# Altium PCB Altium-USBMETER-V1.5-Design-unverified.pcbdoc (part 2 of 2)
Units mm, origin at the board's own origin, x right, y up, seen from the top; angles counter-clockwise.
Board outline 73.46 x 110.88 mm, 4 copper layers (Top Layer, Inner1, Inner2, Bottom Layer); 47 components, 49 nets, 284 pads, 317 vias.
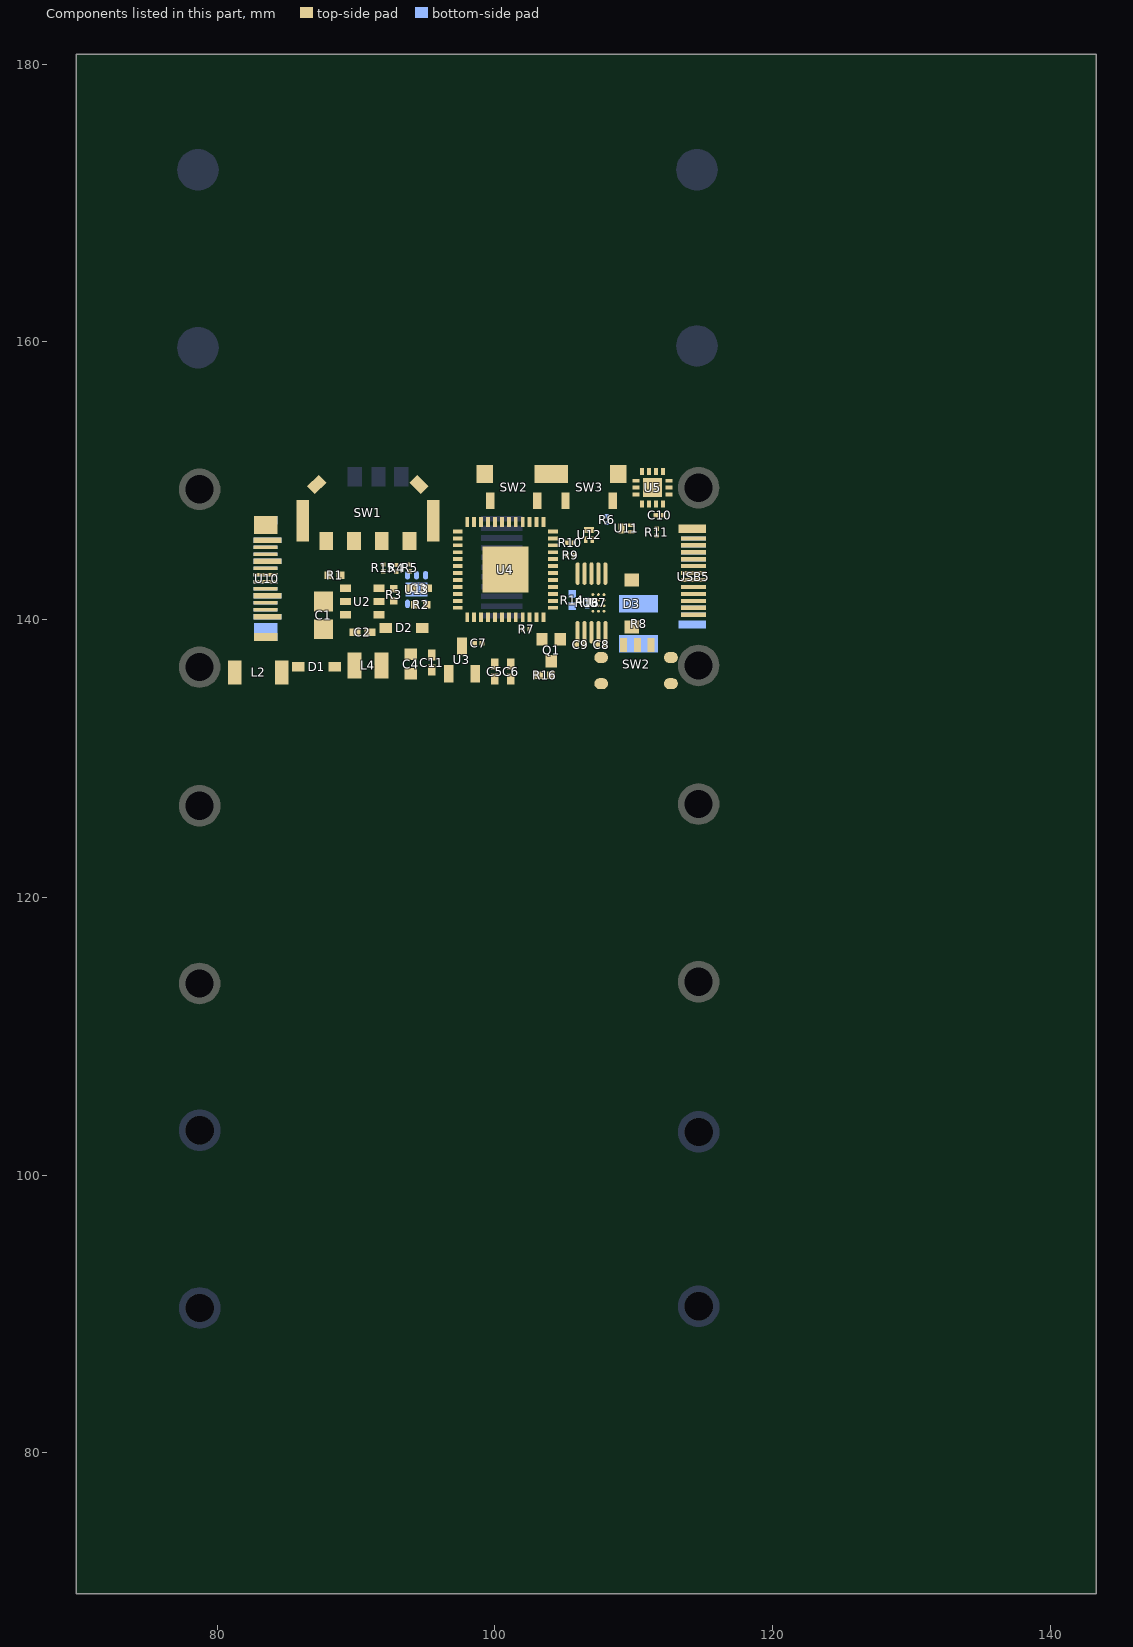
[diagram p4: the components of this part, seen from the top]

## Other copper (continued)
Inner1:
  region net TX: 90.293,149.659 90.293,149.959 90.433,149.909 90.433,149.709
  region net RX: 92.01,149.676 91.71,149.677 91.76,149.536 91.96,149.536
  region net 3V3: 93.134,149.908 93.037,149.624 93.182,149.616 93.254,149.827
  region net 3V3: 96.708,146.443 96.496,146.231 96.432,146.366 96.574,146.507
  region net RX: 96.273,144.708 96.061,144.496 95.997,144.631 96.138,144.772
  region net TX: 95.775,144.273 95.483,144.202 95.482,144.346 95.709,144.401
  region net SW4: 110.673,146.309 110.461,146.521 110.397,146.387 110.538,146.246
  region net SW4: 104.885,142.371 104.673,142.583 104.807,142.647 104.949,142.506
  region net 3V3: 105.343,143.383 105.342,143.083 105.482,143.133 105.483,143.333
  region net IO0: 93.06,144.021 92.848,143.809 92.982,143.745 93.124,143.887
  region net IO0: 98.428,143.459 98.428,143.759 98.288,143.709 98.288,143.509
  region net LNA: 98.66,139.301 98.36,139.301 98.41,139.161 98.61,139.161
  region net LNA: 81.66,135.621 81.448,135.409 81.582,135.345 81.723,135.487
  region net LED-: 102.71,145.476 102.41,145.476 102.46,145.336 102.66,145.336
  region net BL: 104.41,138.741 104.11,138.741 104.16,138.881 104.36,138.881
  region net SDA: 98.128,144.859 98.128,144.559 97.988,144.609 97.988,144.809
  region net SCL: 98.36,145.321 98.148,145.533 98.282,145.597 98.424,145.456
  region net SDA: 106.125,145.298 105.864,145.149 105.835,145.293 106.015,145.396
  region net SCL: 105.807,144.395 105.541,144.257 105.509,144.398 105.709,144.502
  region net DM: 104.91,141.676 104.61,141.676 104.66,141.536 104.86,141.536
  region net DM: 105.41,136.241 105.11,136.241 105.16,136.381 105.36,136.381
  region net DP: 104.91,135.916 104.61,135.916 104.66,136.056 104.86,136.056
  region net CC2: 101.51,150.841 101.21,150.841 101.26,150.98 101.46,150.98
  region net DP: 103.76,141.122 103.548,140.91 103.682,140.847 103.823,140.988
  region net BL: 103.373,143.909 103.161,144.121 103.097,143.987 103.238,143.845
  region net LED-: 102.71,138.541 102.41,138.541 102.46,138.681 102.66,138.681
  region net 3V3: 111.479,147.358 111.478,147.658 111.338,147.608 111.339,147.408
  region net CC2G: 99.793,148.559 99.792,148.859 99.932,148.804 99.933,148.614
  region net CC2: 112.378,143.523 112.078,143.535 112.134,143.673 112.334,143.664
  region net CC1: 111.531,142.667 111.531,142.967 111.391,142.917 111.391,142.717
  region net CC1: 108.736,149.09 108.436,149.092 108.487,149.231 108.687,149.23
  region net CC2G: 106.923,147.358 106.71,147.146 106.65,147.284 106.785,147.418
  region net CC2G: 107.042,147.009 107.042,147.309 107.182,147.254 107.182,147.064
  region net CC2G: 112.028,147.959 112.028,148.259 111.888,148.204 111.888,148.014
  region net CC1G: 110.05,148.436 110.05,148.736 109.91,148.681 109.91,148.491
  region net CC1G: 109.26,147.791 108.96,147.791 109.015,147.931 109.205,147.931
  region net CC1: 86.574,142.501 86.572,142.801 86.705,142.752 86.706,142.552
  region net CC2: 85.883,143.52 85.671,143.307 85.612,143.437 85.753,143.578
  region net TX: 90.433,149.709 90.433,149.909 90.416,149.91 90.398,149.913 90.378,149.917 90.359,149.923 90.34,149.931 90.322,149.939 90.306,149.949 90.293,149.959 90.293,149.659 90.306,149.669 90.322,149.678 90.34,149.687 90.359,149.694 90.378,149.7 90.398,149.705 90.416,149.708
  region net RX: 91.76,149.536 91.96,149.536 91.961,149.553 91.964,149.571 91.969,149.591 91.975,149.61 91.982,149.629 91.991,149.647 92,149.663 92.01,149.676 91.71,149.676 91.72,149.663 91.73,149.647 91.738,149.629 91.746,149.61 91.752,149.591 91.756,149.572 91.759,149.553
  region net 3V3: 93.167,149.631 93.309,149.772 93.291,149.783 93.269,149.788 93.245,149.79 93.198,149.792 93.179,149.796 93.166,149.805 93.16,149.821 92.948,149.609 92.96,149.609 92.974,149.611 92.988,149.614 93.033,149.626 93.08,149.64 93.095,149.643 93.109,149.645 93.123,149.646 93.136,149.645 93.147,149.643 93.158,149.638
  region net 3V3: 96.574,146.507 96.432,146.366 96.443,146.353 96.454,146.338 96.465,146.321 96.474,146.303 96.482,146.284 96.489,146.266 96.494,146.248 96.496,146.231 96.708,146.443 96.692,146.446 96.674,146.45 96.655,146.457 96.636,146.465 96.618,146.475 96.601,146.485 96.586,146.496
  region net RX: 96.138,144.772 95.997,144.631 96.008,144.618 96.019,144.603 96.029,144.586 96.039,144.568 96.047,144.549 96.054,144.531 96.058,144.513 96.061,144.496 96.273,144.708 96.256,144.711 96.238,144.715 96.22,144.722 96.201,144.73 96.183,144.74 96.166,144.75 96.151,144.761
  region net TX: 95.638,144.472 95.497,144.331 95.51,144.309 95.512,144.283 95.507,144.253 95.496,144.221 95.472,144.156 95.463,144.125 95.461,144.096 95.673,144.308 95.656,144.315 95.648,144.329 95.647,144.35 95.652,144.402 95.653,144.429 95.65,144.453
  region net SW4: 110.397,146.387 110.538,146.246 110.551,146.257 110.566,146.268 110.583,146.278 110.601,146.287 110.62,146.296 110.638,146.302 110.656,146.307 110.673,146.309 110.461,146.521 110.458,146.505 110.454,146.487 110.447,146.468 110.439,146.45 110.429,146.431 110.419,146.415 110.408,146.399
  region net SW4: 104.949,142.506 104.807,142.647 104.795,142.636 104.78,142.625 104.763,142.615 104.745,142.605 104.726,142.597 104.707,142.59 104.689,142.586 104.673,142.583 104.885,142.371 104.887,142.388 104.892,142.406 104.898,142.424 104.907,142.443 104.916,142.461 104.927,142.478 104.937,142.493
  region net 3V3: 105.483,143.133 105.483,143.333 105.466,143.334 105.448,143.337 105.428,143.342 105.409,143.348 105.39,143.356 105.372,143.364 105.356,143.374 105.343,143.384 105.343,143.084 105.356,143.094 105.372,143.103 105.39,143.112 105.409,143.119 105.428,143.125 105.447,143.129 105.466,143.132
  region net IO0: 92.982,143.745 93.124,143.887 93.112,143.899 93.102,143.914 93.091,143.931 93.082,143.949 93.073,143.968 93.067,143.987 93.062,144.005 93.06,144.021 92.848,143.809 92.864,143.807 92.882,143.802 92.901,143.796 92.92,143.787 92.938,143.778 92.955,143.767 92.97,143.756
  region net IO0: 98.288,143.709 98.288,143.509 98.304,143.508 98.323,143.505 98.342,143.501 98.361,143.494 98.381,143.487 98.398,143.479 98.414,143.469 98.428,143.459 98.428,143.759 98.414,143.749 98.398,143.74 98.381,143.731 98.361,143.724 98.342,143.718 98.323,143.713 98.304,143.71
  region net LNA: 98.41,139.161 98.61,139.161 98.611,139.178 98.614,139.196 98.619,139.216 98.625,139.235 98.632,139.254 98.641,139.272 98.65,139.288 98.66,139.301 98.36,139.301 98.37,139.288 98.38,139.272 98.388,139.254 98.396,139.235 98.402,139.216 98.406,139.196 98.409,139.178
  region net LNA: 81.582,135.345 81.724,135.487 81.713,135.499 81.702,135.514 81.691,135.531 81.682,135.549 81.673,135.568 81.667,135.587 81.662,135.605 81.66,135.621 81.448,135.409 81.464,135.407 81.482,135.402 81.501,135.395 81.52,135.387 81.538,135.378 81.555,135.367 81.57,135.356
  region net LED-: 102.46,145.336 102.66,145.336 102.661,145.353 102.664,145.371 102.669,145.391 102.675,145.41 102.682,145.429 102.691,145.447 102.7,145.463 102.71,145.476 102.41,145.476 102.42,145.463 102.43,145.447 102.438,145.429 102.445,145.41 102.452,145.391 102.456,145.371 102.459,145.353
  region net BL: 104.36,138.881 104.16,138.881 104.159,138.864 104.156,138.846 104.152,138.827 104.146,138.807 104.138,138.788 104.13,138.77 104.12,138.754 104.11,138.741 104.41,138.741 104.4,138.754 104.391,138.77 104.382,138.788 104.375,138.807 104.369,138.827 104.364,138.846 104.361,138.864
  region net SDA: 97.988,144.809 97.988,144.609 98.005,144.608 98.023,144.605 98.042,144.6 98.062,144.594 98.081,144.587 98.099,144.578 98.115,144.569 98.128,144.559 98.128,144.859 98.115,144.849 98.099,144.839 98.081,144.831 98.062,144.823 98.042,144.817 98.023,144.813 98.005,144.81
  region net SCL: 98.424,145.456 98.282,145.597 98.27,145.586 98.255,145.575 98.238,145.565 98.22,145.555 98.201,145.547 98.182,145.54 98.164,145.536 98.148,145.533 98.36,145.321 98.362,145.338 98.367,145.356 98.373,145.374 98.382,145.393 98.391,145.411 98.402,145.428 98.413,145.443
  region net SDA: 105.989,145.422 105.847,145.281 105.858,145.269 105.866,145.258 105.872,145.248 105.876,145.238 105.878,145.228 105.879,145.218 105.878,145.208 105.876,145.199 105.868,145.167 105.863,145.142 105.861,145.128 105.86,145.113 105.861,145.096 106.073,145.308 106.059,145.313 106.046,145.323 106.036,145.338 106.026,145.355 106.008,145.393 105.999,145.409
  region net SCL: 105.709,144.481 105.509,144.481 105.514,144.461 105.526,144.441 105.543,144.423 105.578,144.389 105.589,144.373 105.593,144.357 105.585,144.341 105.885,144.341 105.876,144.35 105.865,144.359 105.853,144.367 105.825,144.382 105.767,144.413 105.753,144.421 105.741,144.429 105.731,144.438 105.722,144.448 105.715,144.458 105.711,144.469
  region net DM: 104.66,141.536 104.86,141.536 104.861,141.553 104.864,141.572 104.869,141.591 104.875,141.61 104.882,141.629 104.891,141.647 104.9,141.663 104.91,141.676 104.61,141.676 104.62,141.663 104.63,141.647 104.638,141.629 104.646,141.61 104.652,141.591 104.656,141.572 104.659,141.553
  region net DM: 105.36,136.381 105.16,136.381 105.159,136.364 105.156,136.346 105.152,136.327 105.145,136.307 105.138,136.288 105.13,136.27 105.12,136.254 105.11,136.241 105.41,136.241 105.4,136.254 105.391,136.27 105.382,136.288 105.375,136.307 105.369,136.327 105.364,136.346 105.361,136.364
  region net DP: 104.86,136.056 104.66,136.056 104.659,136.039 104.656,136.021 104.652,136.002 104.646,135.982 104.638,135.963 104.63,135.945 104.62,135.929 104.61,135.916 104.91,135.916 104.9,135.929 104.891,135.945 104.882,135.963 104.875,135.982 104.869,136.002 104.864,136.021 104.861,136.039
  region net CC2: 101.46,150.98 101.26,150.98 101.259,150.964 101.256,150.946 101.252,150.926 101.245,150.907 101.238,150.888 101.23,150.87 101.22,150.854 101.21,150.841 101.51,150.841 101.5,150.854 101.491,150.87 101.482,150.888 101.475,150.907 101.469,150.926 101.464,150.946 101.461,150.964
  region net DP: 103.682,140.847 103.823,140.988 103.812,141.001 103.801,141.016 103.791,141.032 103.781,141.051 103.773,141.069 103.767,141.088 103.762,141.106 103.76,141.122 103.548,140.91 103.564,140.908 103.582,140.903 103.601,140.897 103.619,140.888 103.638,140.879 103.654,140.869 103.669,140.858
  region net BL: 103.097,143.987 103.238,143.846 103.251,143.857 103.266,143.867 103.283,143.878 103.301,143.887 103.32,143.896 103.338,143.902 103.356,143.907 103.373,143.909 103.161,144.121 103.158,144.105 103.154,144.087 103.147,144.068 103.139,144.05 103.129,144.031 103.119,144.014 103.108,143.999
  region net LED-: 102.66,138.681 102.46,138.681 102.459,138.664 102.456,138.646 102.452,138.627 102.445,138.607 102.438,138.588 102.43,138.57 102.42,138.554 102.41,138.541 102.71,138.541 102.7,138.554 102.691,138.57 102.682,138.588 102.675,138.607 102.669,138.627 102.664,138.646 102.661,138.664
  region net 3V3: 111.339,147.608 111.339,147.408 111.355,147.407 111.374,147.404 111.393,147.4 111.413,147.394 111.432,147.387 111.449,147.378 111.465,147.369 111.479,147.359 111.479,147.659 111.465,147.649 111.449,147.639 111.432,147.631 111.412,147.623 111.393,147.617 111.374,147.612 111.355,147.609
  region net CC2G: 99.932,148.614 99.932,148.804 99.916,148.806 99.898,148.809 99.878,148.814 99.859,148.821 99.839,148.83 99.822,148.839 99.806,148.849 99.792,148.859 99.792,148.559 99.806,148.569 99.822,148.579 99.84,148.589 99.859,148.597 99.878,148.604 99.897,148.61 99.916,148.613
  region net CC2: 112.334,143.664 112.134,143.673 112.132,143.656 112.128,143.638 112.123,143.619 112.116,143.599 112.108,143.581 112.099,143.563 112.089,143.548 112.078,143.535 112.378,143.523 112.368,143.536 112.36,143.553 112.352,143.571 112.345,143.59 112.34,143.61 112.336,143.629 112.334,143.648
  region net CC1: 111.391,142.917 111.391,142.717 111.407,142.716 111.426,142.713 111.445,142.708 111.465,142.702 111.484,142.695 111.501,142.686 111.517,142.677 111.531,142.667 111.531,142.967 111.517,142.957 111.501,142.947 111.484,142.939 111.465,142.931 111.445,142.925 111.426,142.921 111.407,142.918
  region net CC1: 108.687,149.23 108.487,149.231 108.485,149.215 108.482,149.196 108.478,149.177 108.472,149.158 108.464,149.138 108.455,149.121 108.446,149.105 108.436,149.092 108.736,149.09 108.726,149.104 108.717,149.119 108.708,149.137 108.701,149.156 108.695,149.176 108.69,149.195 108.687,149.214
  region net CC2G: 106.785,147.418 106.65,147.284 106.661,147.271 106.672,147.256 106.682,147.239 106.691,147.22 106.698,147.2 106.704,147.181 106.708,147.163 106.711,147.146 106.923,147.358 106.906,147.36 106.888,147.365 106.869,147.371 106.849,147.378 106.83,147.387 106.813,147.397 106.797,147.408
  region net CC2G: 107.182,147.064 107.182,147.254 107.166,147.255 107.147,147.259 107.128,147.264 107.109,147.271 107.089,147.279 107.072,147.289 107.056,147.299 107.042,147.309 107.042,147.009 107.056,147.019 107.072,147.029 107.089,147.038 107.109,147.047 107.128,147.054 107.147,147.059 107.166,147.063
  region net CC2G: 111.888,148.204 111.888,148.014 111.905,148.013 111.923,148.009 111.942,148.004 111.962,147.997 111.981,147.988 111.999,147.979 112.015,147.969 112.028,147.959 112.028,148.259 112.015,148.248 111.999,148.239 111.981,148.229 111.962,148.221 111.942,148.214 111.923,148.208 111.905,148.205
  region net CC1G: 109.91,148.681 109.91,148.491 109.927,148.49 109.945,148.487 109.965,148.481 109.984,148.474 110.003,148.466 110.021,148.456 110.037,148.447 110.05,148.436 110.05,148.736 110.037,148.726 110.021,148.716 110.003,148.707 109.984,148.698 109.965,148.691 109.945,148.686 109.927,148.683
  region net CC1G: 109.205,147.931 109.015,147.931 109.014,147.914 109.011,147.896 109.005,147.877 108.998,147.857 108.99,147.838 108.98,147.82 108.971,147.804 108.96,147.791 109.26,147.791 109.25,147.804 109.24,147.82 109.231,147.838 109.222,147.857 109.215,147.877 109.21,147.896 109.207,147.914
  region net CC1: 86.707,142.552 86.705,142.752 86.689,142.753 86.672,142.756 86.653,142.76 86.635,142.767 86.616,142.774 86.599,142.783 86.584,142.792 86.572,142.801 86.575,142.501 86.587,142.511 86.602,142.52 86.619,142.528 86.637,142.536 86.655,142.542 86.674,142.547 86.691,142.55
  region net CC2: 85.753,143.578 85.611,143.437 85.622,143.425 85.632,143.41 85.642,143.394 85.651,143.376 85.658,143.358 85.665,143.34 85.669,143.323 85.671,143.308 85.883,143.52 85.868,143.522 85.851,143.526 85.832,143.532 85.814,143.54 85.796,143.548 85.779,143.558 85.765,143.568
  region net CC2: 110.391,136.713 110.513,136.835 110.501,136.849 110.491,136.865 110.482,136.883 110.475,136.902 110.469,136.922 110.464,136.941 110.461,136.961 110.459,136.979 110.247,136.767 110.266,136.765 110.285,136.762 110.305,136.758 110.325,136.752 110.344,136.745 110.361,136.736 110.377,136.725
  region net CC1: 94.066,140.163 93.894,140.163 93.893,140.144 93.888,140.126 93.882,140.107 93.874,140.088 93.864,140.07 93.854,140.053 93.842,140.037 93.83,140.023 94.13,140.023 94.118,140.037 94.106,140.053 94.096,140.07 94.086,140.088 94.078,140.107 94.072,140.126 94.067,140.144
  region net CC2: 113.878,143.158 113.706,143.158 ccw(c112.758,143.158) 113.492,143.758 114.092,143.758 ccw(c114.826,143.158)
  region net CC1: 87.86,149.909 87.688,149.909 ccw(c86.74,149.909) 87.474,150.509 88.074,150.509 ccw(c88.808,149.909)
Inner2:
  region net 302INT: 98.259,145.895 98.047,146.107 98.181,146.171 98.323,146.03
  region net SDA: 106.193,145.258 106.192,144.958 106.332,145.008 106.333,145.208
  region net SCL: 105.868,144.359 105.867,144.059 106.007,144.109 106.007,144.309
  region net DM: 105.22,136.305 105.071,136.045 104.972,136.155 105.076,136.334
  region net DM: 105.453,136.161 105.288,135.911 105.421,135.859 105.553,136.059
  region net DM: 105.248,135.909 105.46,136.121 105.481,136.029 105.34,135.888
  region net DP: 104.91,135.651 104.61,135.651 104.66,135.563 104.86,135.562
  region net DP: 104.91,135.651 104.61,135.651 104.66,135.56 104.86,135.56
  region net 302INT: 111.76,150.476 111.46,150.476 111.51,150.336 111.71,150.336
  region net SDA: 110.782,150.506 110.487,150.451 110.56,150.322 110.76,150.36
  region net SCL: 111.26,150.726 110.96,150.727 111.01,150.587 111.21,150.586
  region net SUB1: 111.813,143.548 111.513,143.549 111.564,143.689 111.764,143.689
  region net SUB2: 112.373,142.704 112.073,142.704 112.123,142.564 112.323,142.564
  region net DM: 112.915,142.687 112.915,142.987 113.055,142.937 113.055,142.737
  region net DP: 112.915,143.546 112.914,143.246 113.055,143.296 113.055,143.496
  region net SUB1: 86.591,143.482 86.291,143.483 86.342,143.623 86.542,143.622
  region net DP: 84.765,142.857 84.765,143.142 84.632,143.1 84.632,142.9
  region net DM: 85.534,142.84 85.259,142.918 85.26,142.78 85.46,142.723
  region net SUB2: 85.955,142.478 85.68,142.599 85.663,142.454 85.859,142.367
  region net 302INT: 98.323,146.03 98.181,146.171 98.169,146.16 98.154,146.149 98.137,146.139 98.119,146.129 98.1,146.121 98.081,146.114 98.063,146.11 98.047,146.107 98.259,145.895 98.261,145.912 98.266,145.93 98.273,145.948 98.281,145.967 98.29,145.985 98.301,146.002 98.312,146.017
  region net SDA: 106.333,145.008 106.333,145.208 106.316,145.209 106.298,145.212 106.278,145.217 106.259,145.223 106.24,145.231 106.222,145.239 106.206,145.249 106.193,145.259 106.193,144.959 106.206,144.969 106.222,144.978 106.24,144.987 106.259,144.994 106.278,145 106.297,145.004 106.316,145.007
  region net SCL: 106.007,144.109 106.007,144.309 105.991,144.31 105.972,144.313 105.953,144.317 105.934,144.323 105.914,144.331 105.897,144.339 105.881,144.349 105.867,144.359 105.867,144.059 105.881,144.069 105.897,144.078 105.914,144.087 105.933,144.094 105.953,144.1 105.972,144.105 105.991,144.108
  region net DM: 105.532,135.859 105.532,136.059 105.519,136.06 105.507,136.065 105.496,136.073 105.487,136.083 105.478,136.095 105.47,136.109 105.455,136.14 105.428,136.206 105.42,136.222 105.412,136.236 105.403,136.248 105.392,136.259 105.392,135.959 105.409,135.966 105.425,135.961 105.441,135.945 105.473,135.901 105.491,135.88 105.51,135.865
  region net DM: 105.34,135.888 105.481,136.029 105.467,136.05 105.461,136.071 105.46,136.121 105.248,135.909 105.286,135.908 105.298,135.908 105.309,135.906 105.319,135.902 105.33,135.896
  region net DM: 105.088,136.322 104.947,136.181 104.96,136.17 104.977,136.161 105.014,136.143 105.031,136.133 105.046,136.123 105.056,136.11 105.061,136.096 105.273,136.308 105.256,136.309 105.241,136.308 105.227,136.306 105.203,136.301 105.171,136.293 105.161,136.292 105.151,136.291 105.141,136.291 105.132,136.293 105.122,136.297 105.111,136.303 105.1,136.311
  region net DP: 104.66,135.56 104.86,135.56 104.861,135.574 104.864,135.586 104.869,135.598 104.876,135.609 104.883,135.62 104.91,135.651 104.61,135.651 104.629,135.63 104.637,135.62 104.644,135.609 104.651,135.598 104.656,135.586 104.659,135.573
  region net DP: 104.66,135.562 104.86,135.562 104.861,135.576 104.864,135.588 104.869,135.6 104.876,135.61 104.883,135.621 104.91,135.651 104.61,135.651 104.637,135.621 104.644,135.61 104.651,135.6 104.656,135.588 104.659,135.576
  region net 302INT: 111.51,150.336 111.71,150.336 111.711,150.353 111.714,150.371 111.719,150.391 111.725,150.41 111.732,150.429 111.741,150.447 111.75,150.463 111.76,150.476 111.46,150.476 111.47,150.463 111.48,150.447 111.488,150.429 111.496,150.41 111.502,150.391 111.506,150.371 111.509,150.353
  region net SDA: 110.56,150.336 110.76,150.336 110.759,150.351 110.752,150.41 110.75,150.43 110.75,150.448 110.753,150.464 110.76,150.476 110.46,150.476 110.479,150.457 110.514,150.427 110.529,150.413 110.536,150.406 110.542,150.399 110.547,150.391 110.552,150.382 110.555,150.372 110.558,150.362 110.56,150.35
  region net SCL: 111.01,150.586 111.21,150.586 111.211,150.603 111.214,150.622 111.219,150.641 111.225,150.66 111.232,150.679 111.241,150.697 111.25,150.713 111.26,150.726 110.96,150.726 110.97,150.713 110.98,150.697 110.988,150.679 110.996,150.66 111.002,150.641 111.006,150.622 111.009,150.603
  region net SUB1: 111.764,143.689 111.564,143.689 111.563,143.672 111.56,143.654 111.555,143.635 111.549,143.615 111.541,143.596 111.532,143.578 111.523,143.562 111.513,143.549 111.813,143.549 111.803,143.562 111.794,143.578 111.785,143.596 111.778,143.615 111.772,143.634 111.768,143.654 111.765,143.672
  region net SUB2: 112.123,142.564 112.323,142.564 112.324,142.581 112.326,142.599 112.331,142.619 112.337,142.638 112.345,142.657 112.353,142.675 112.362,142.691 112.373,142.704 112.073,142.704 112.083,142.691 112.092,142.675 112.1,142.657 112.108,142.638 112.114,142.619 112.119,142.599 112.121,142.581
  region net DM: 113.055,142.737 113.055,142.937 113.038,142.938 113.02,142.941 113,142.945 112.981,142.951 112.962,142.959 112.944,142.967 112.928,142.977 112.915,142.987 112.915,142.687 112.928,142.697 112.944,142.706 112.962,142.715 112.981,142.722 113.001,142.728 113.02,142.733 113.038,142.736
  region net DP: 113.055,143.296 113.055,143.496 113.038,143.497 113.02,143.5 113.001,143.505 112.981,143.511 112.962,143.518 112.944,143.527 112.928,143.537 112.915,143.547 112.915,143.247 112.928,143.257 112.944,143.266 112.962,143.274 112.981,143.282 113,143.287 113.02,143.292 113.038,143.295
  region net SUB1: 86.542,143.622 86.342,143.622 86.34,143.606 86.337,143.587 86.333,143.568 86.326,143.548 86.319,143.529 86.31,143.511 86.301,143.496 86.291,143.482 86.591,143.482 86.581,143.496 86.571,143.512 86.563,143.529 86.556,143.548 86.55,143.568 86.545,143.587 86.542,143.606
  region net DP: 84.632,143.1 84.632,142.9 84.649,142.899 84.666,142.897 84.685,142.894 84.703,142.889 84.72,142.883 84.737,142.876 84.752,142.867 84.765,142.858 84.765,143.143 84.752,143.133 84.737,143.124 84.72,143.117 84.703,143.111 84.684,143.106 84.666,143.102 84.649,143.1
  region net DM: 85.26,142.741 85.46,142.741 85.461,142.756 85.463,142.769 85.466,142.78 85.47,142.789 85.475,142.797 85.481,142.804 85.488,142.81 85.496,142.816 85.522,142.832 85.542,142.846 85.552,142.854 85.563,142.863 85.573,142.874 85.288,142.874 85.295,142.861 85.295,142.846 85.291,142.83 85.285,142.812 85.269,142.775 85.263,142.758
  region net SUB2: 85.677,142.468 85.819,142.327 85.83,142.342 85.837,142.362 85.846,142.405 85.851,142.426 85.858,142.443 85.868,142.455 85.883,142.46 85.671,142.672 85.672,142.649 85.688,142.564 85.692,142.536 85.693,142.509 85.688,142.486
  region net VCONN: 111.128,137.403 111.006,137.281 111.018,137.267 111.029,137.251 111.038,137.233 111.045,137.215 111.051,137.195 111.055,137.175 111.058,137.156 111.06,137.137 111.272,137.349 111.254,137.351 111.234,137.354 111.214,137.359 111.195,137.364 111.176,137.372 111.158,137.381 111.142,137.391
  region net VCONN: 95.545,140.126 95.717,140.126 95.718,140.145 95.723,140.163 95.729,140.182 95.737,140.201 95.747,140.219 95.757,140.236 95.769,140.252 95.781,140.266 95.481,140.266 95.493,140.252 95.505,140.236 95.515,140.219 95.525,140.201 95.533,140.182 95.539,140.163 95.544,140.145
  region net DM: 105.34,135.888 105.481,136.029 ccw(c105.41,135.959) 105.409,136.059 105.24,136.03 ccw(c105.693,136.242)
Bottom Layer:
  region net DP: 84.902,142.81 84.701,143.012 84.644,142.881 84.771,142.754
  region net CC1: 86.591,142.518 86.291,142.517 86.352,142.377 86.532,142.378
  region net SUB1: 86.591,143.482 86.291,143.483 86.352,143.623 86.532,143.622
  region net CC1: 111.812,142.683 111.512,142.685 111.561,142.545 111.761,142.544
  region net SUB1: 111.812,143.55 111.512,143.548 111.561,143.646 111.761,143.648
  region net RES: 103.328,145.534 103.328,145.234 103.188,145.285 103.188,145.485
  region net DC: 103.328,144.658 103.328,144.958 103.188,144.908 103.188,144.708
  region net CLK: 103.428,143.634 103.427,143.334 103.309,143.385 103.31,143.585
  region net MOSI: 103.386,142.922 103.597,142.709 103.482,142.665 103.341,142.806
  region net IN+: 107.393,139.959 107.392,140.259 107.532,140.209 107.532,140.009
  region net 3V3: 111.761,147.641 111.461,147.641 111.511,147.781 111.711,147.781
  region net 3V3: 112.685,150.476 112.385,150.476 112.435,150.336 112.635,150.336
  region net LED-: 102.572,145.808 102.361,145.596 102.297,145.73 102.438,145.872
  region net LED-: 102.572,145.808 102.361,145.596 102.297,145.73 102.438,145.872
  region net NTC: 100.193,139.459 100.193,139.759 100.333,139.709 100.333,139.509
  region net 3V3: 96.895,146.231 96.683,146.443 96.818,146.507 96.959,146.365
  region net MOSI: 102.011,140.484 102.011,140.084 102.311,140.493 102.311,140.775
  region net CLK: 102.011,141.183 102.011,140.785 102.311,141.194 102.311,141.476
  region net DC: 102.011,141.884 102.011,141.484 102.06,141.584 102.06,141.784
  region net RES: 102.011,142.585 102.011,142.185 102.111,142.285 102.111,142.485
  region net 3V3: 99.011,146.383 99.011,146.783 98.711,146.683 98.711,146.483
  region net 3V3: 99.011,146.383 99.011,146.783 98.834,146.683 98.834,146.483
  region net 3V3: 99.011,144.984 99.011,145.384 98.885,145.284 98.885,145.084
  region net LED-: 102.01,146.084 102.01,145.684 102.286,145.782 102.286,145.982
  region net LED-: 102.01,146.084 102.01,145.684 102.286,145.782 102.286,145.982
  region net NTC: 106.498,141.119 106.498,140.816 106.198,140.871 106.198,141.071
  region net IN+: 110.111,140.509 110.611,140.509 110.461,140.31 110.261,140.31
  region net NTC: 105.83,141.223 105.83,140.723 106.13,140.871 106.13,141.071
  region net NTC: 105.29,140.725 105.29,141.225 104.99,141.075 104.99,140.875
  region net CC1: 84.337,142.347 84.337,142.097 84.607,142.122 84.607,142.302
  region net DP: 84.337,142.847 84.337,142.597 84.607,142.633 84.607,142.813
  region net DM: 84.337,143.347 84.337,143.097 84.493,143.13 84.493,143.31
  region net SUB1: 84.337,143.847 84.337,143.597 84.463,143.631 84.463,143.811
  region net SUB1: 113.423,143.707 113.423,144.007 113.123,143.955 113.123,143.755
  region net CC1: 113.423,142.206 113.423,142.506 113.123,142.454 113.123,142.254
  region net LED-: 102.286,145.782 102.286,145.982 cw(c102.286,146.408) 102.01,146.084 102.01,145.684 cw(c102.286,145.348)
  region net LED-: 102.286,145.782 102.286,145.982 cw(c102.286,146.408) 102.01,146.084 102.01,145.684 cw(c102.286,145.348)
  region net 3V3: 98.885,145.284 98.885,145.084 cw(c98.885,144.955) 99.011,144.984 99.011,145.384 cw(c98.885,145.413)
  region net 3V3: 98.711,146.683 98.711,146.483 cw(c98.711,145.983) 99.011,146.383 99.011,146.783 cw(c98.711,147.183)
  region net 3V3: 98.834,146.683 98.834,146.483 cw(c98.834,145.735) 99.011,146.462 99.011,146.705 cw(c98.834,147.432)
  region net RES: 102.111,142.285 102.111,142.485 cw(c102.111,142.733) 102.011,142.506 102.011,142.264 cw(c102.111,142.036)
  region net DC: 102.06,141.584 102.06,141.784 cw(c102.06,141.852) 102.011,141.805 102.011,141.563 cw(c102.06,141.515)
  region net VCONN: 94.925,140.656 95.097,140.656 95.101,140.678 95.189,140.998 95.193,141.02 94.829,141.02 94.833,140.998 94.921,140.678
  region net CC1: 94.275,140.602 94.447,140.602 94.451,140.626 94.539,140.996 94.543,141.02 94.179,141.02 94.183,140.996 94.271,140.626
  region net 3V3: 96.959,146.365 96.818,146.507 96.805,146.496 96.79,146.485 96.773,146.475 96.755,146.465 96.736,146.457 96.717,146.45 96.699,146.446 96.683,146.443 96.895,146.231 96.897,146.248 96.902,146.266 96.909,146.284 96.917,146.303 96.927,146.321 96.937,146.338 96.948,146.353
  region net NTC: 100.333,139.509 100.333,139.709 100.316,139.71 100.297,139.713 100.278,139.717 100.259,139.723 100.24,139.731 100.222,139.739 100.206,139.749 100.193,139.759 100.193,139.459 100.206,139.469 100.222,139.478 100.24,139.487 100.259,139.494 100.278,139.5 100.297,139.505 100.316,139.508
  region net LED-: 102.438,145.872 102.297,145.73 102.308,145.718 102.319,145.703 102.329,145.686 102.339,145.668 102.347,145.649 102.354,145.63 102.358,145.613 102.361,145.596 102.573,145.808 102.556,145.81 102.538,145.815 102.52,145.822 102.501,145.83 102.483,145.839 102.466,145.85 102.451,145.861
  region net LED-: 102.438,145.872 102.297,145.73 102.308,145.718 102.319,145.703 102.329,145.686 102.339,145.668 102.347,145.649 102.354,145.63 102.358,145.613 102.361,145.596 102.573,145.808 102.556,145.81 102.538,145.815 102.52,145.822 102.501,145.83 102.483,145.839 102.466,145.85 102.451,145.861
  region net 3V3: 112.435,150.336 112.635,150.336 112.636,150.353 112.639,150.371 112.644,150.391 112.65,150.41 112.657,150.429 112.666,150.447 112.675,150.463 112.685,150.476 112.385,150.476 112.395,150.463 112.405,150.447 112.413,150.429 112.421,150.41 112.427,150.391 112.431,150.371 112.434,150.353
  region net 3V3: 111.711,147.781 111.511,147.781 111.51,147.764 111.507,147.746 111.502,147.727 111.496,147.707 111.489,147.688 111.48,147.67 111.471,147.654 111.461,147.641 111.761,147.641 111.751,147.654 111.741,147.67 111.733,147.688 111.726,147.707 111.719,147.727 111.715,147.746 111.712,147.764
  region net IN+: 107.532,140.009 107.532,140.209 107.516,140.21 107.497,140.213 107.478,140.217 107.459,140.223 107.439,140.231 107.422,140.239 107.406,140.249 107.392,140.259 107.392,139.959 107.406,139.969 107.422,139.978 107.439,139.987 107.459,139.994 107.478,140 107.497,140.005 107.516,140.008
  region net MOSI: 103.341,142.806 103.482,142.665 103.493,142.674 103.506,142.683 103.52,142.69 103.536,142.696 103.552,142.701 103.567,142.705 103.583,142.708 103.598,142.709 103.386,142.921 103.384,142.907 103.381,142.891 103.377,142.875 103.372,142.86 103.366,142.844 103.358,142.83 103.35,142.817
  region net CLK: 103.31,143.585 103.31,143.385 103.325,143.384 103.34,143.38 103.356,143.375 103.372,143.369 103.388,143.361 103.403,143.352 103.416,143.343 103.428,143.334 103.428,143.634 103.416,143.624 103.403,143.616 103.388,143.607 103.372,143.6 103.356,143.594 103.34,143.589 103.324,143.586
  region net DC: 103.188,144.908 103.188,144.708 103.205,144.707 103.223,144.704 103.242,144.7 103.262,144.694 103.281,144.687 103.299,144.678 103.315,144.669 103.328,144.659 103.328,144.959 103.315,144.949 103.299,144.939 103.281,144.931 103.262,144.923 103.242,144.917 103.223,144.912 103.205,144.909
  region net RES: 103.188,145.485 103.188,145.285 103.205,145.284 103.223,145.28 103.242,145.276 103.262,145.269 103.281,145.262 103.299,145.253 103.315,145.244 103.328,145.234 103.328,145.534 103.315,145.524 103.299,145.514 103.281,145.506 103.262,145.499 103.242,145.493 103.223,145.488 103.205,145.486
  region net SUB1: 111.761,143.647 111.561,143.647 111.56,143.634 111.557,143.62 111.552,143.607 111.546,143.595 111.539,143.582 111.531,143.571 111.513,143.549 111.813,143.549 111.794,143.571 111.785,143.583 111.777,143.594 111.771,143.607 111.766,143.619 111.762,143.633
  region net CC1: 111.561,142.544 111.761,142.544 111.762,142.561 111.766,142.579 111.77,142.598 111.777,142.618 111.785,142.637 111.794,142.655 111.803,142.671 111.813,142.684 111.513,142.684 111.523,142.671 111.532,142.655 111.541,142.637 111.548,142.618 111.553,142.599 111.558,142.58 111.56,142.561
  region net SUB1: 86.532,143.622 86.352,143.622 86.35,143.605 86.346,143.586 86.34,143.567 86.333,143.548 86.323,143.53 86.313,143.512 86.302,143.496 86.291,143.482 86.591,143.482 86.58,143.496 86.569,143.512 86.559,143.53 86.55,143.548 86.542,143.567 86.537,143.586 86.533,143.605
  region net CC1: 86.352,142.378 86.532,142.378 86.533,142.395 86.537,142.414 86.542,142.433 86.55,142.452 86.559,142.47 86.569,142.488 86.58,142.504 86.591,142.518 86.291,142.518 86.302,142.504 86.313,142.488 86.323,142.47 86.333,142.452 86.34,142.433 86.346,142.414 86.35,142.396
  region net DP: 84.644,142.881 84.771,142.754 84.783,142.764 84.798,142.774 84.815,142.784 84.833,142.792 84.851,142.799 84.869,142.804 84.887,142.808 84.903,142.81 84.701,143.012 84.699,142.996 84.695,142.979 84.689,142.961 84.682,142.942 84.674,142.924 84.664,142.908 84.654,142.893
  region net DM: 85.521,143.259 85.341,143.259 85.339,143.243 85.336,143.225 85.331,143.207 85.324,143.188 85.316,143.17 85.308,143.153 85.298,143.138 85.288,143.126 85.573,143.126 85.564,143.138 85.554,143.153 85.545,143.17 85.537,143.188 85.53,143.207 85.525,143.225 85.522,143.243
  region net VCONN: 95.359,140.485 95.359,140.313 95.377,140.311 95.396,140.307 95.415,140.301 95.433,140.293 95.451,140.283 95.468,140.272 95.484,140.26 95.499,140.249 95.499,140.549 95.484,140.537 95.468,140.525 95.451,140.514 95.433,140.505 95.415,140.496 95.396,140.49 95.377,140.486
  region net CC1: 94.233,140.022 94.112,140.144 94.098,140.132 94.082,140.121 94.064,140.113 94.045,140.105 94.025,140.099 94.006,140.095 93.986,140.092 93.967,140.09 94.18,139.878 94.181,139.897 94.184,139.916 94.189,139.936 94.195,139.955 94.202,139.974 94.211,139.992 94.221,140.008
  region net LED-: 102.427,145.6 102.569,145.741 102.357,145.812 101.986,145.982
  region net LED-: 102.386,145.641 102.498,145.812 ccw(c102.293,145.606) 102.386,145.881 102.287,145.782 ccw(c102.737,145.992)
  region net LED-: 102.086,145.982 102.045,145.782 ccw(c102.045,146.279) 102.215,145.812 102.215,145.952 ccw(c102.086,145.692)

## Silkscreen, mask and mechanical layers (free items; w line width, h text height)
Top Silkscreen Layer:
  lines w1: 76.327,136.938 ccw(c78.327,136.938) 78.327,134.938 114.84,134.938 ccw(c114.84,136.938) 116.84,136.938 116.84,149.194 ccw(c114.84,149.194) 114.84,151.194 78.327,151.194 ccw(c78.327,149.194) 76.327,149.194 76.327,136.938
  text "JLCJLCJLCJLC" at 81.245,115.355 h0.84 r90
Bottom Silkscreen Layer:
  lines w0.2: 84.61,137.814 84.61,136.314 86.11,136.314 ; 84.61,148.334 84.61,149.834 86.11,149.834 ; 84.612,115.033 84.612,113.533 86.112,113.533 ; 84.611,125.552 84.611,127.052 86.111,127.052 ; 111.06,136.314 112.56,136.314 112.56,137.814 ; 111.06,149.815 112.56,149.815 112.56,148.315 ; 111.062,113.533 112.562,113.533 112.562,115.033 ; 111.062,127.033 112.562,127.033 112.562,125.533
  text "-" at 87.31,150.055 h0.76
  text "+" at 94.86,149.905 h0.76
  text "+ RX TX -" at 93.902,148.302 h0.77
  text "13" at 102.788,147.806 h1.98
Top Solder Mask Layer:
  region: 114.922,138.116 117.023,138.116 117.023,139.018 114.922,139.018
  region: 114.922,147.366 117.023,147.366 117.023,148.267 114.922,148.267
  region: 76.409,137.508 84.311,137.508 84.311,138.51 76.409,138.51
  region: 76.509,147.458 84.411,147.458 84.411,148.459 76.509,148.459
  lines w0.3: 83.56,141.709 85.56,141.709 85.96,141.309 85.96,140.109 ; 83.585,144.209 87.06,144.209 87.46,143.809 87.76,143.509 87.76,141.009 ; 109.46,141.609 109.46,143.909 109.91,144.359 114.31,144.359 ; 110.96,141.309 111.51,141.859 114.31,141.859
  lines w0.7: 110.49,96.076 115.49,96.076 114.288,94.873 ; 111.692,98.675 110.49,97.473 115.49,97.473
  lines w1: 76.328,114.156 ccw(c78.328,114.156) 78.328,112.156 114.841,112.156 ccw(c114.841,114.156) 116.841,114.156 116.841,126.412 ccw(c114.841,126.412) 114.841,128.412 78.328,128.412 ccw(c78.328,126.412) 76.328,126.412 76.328,114.156 ; 76.335,160.018 ccw(c78.335,160.018) 78.335,158.018 114.848,158.018 ccw(c114.848,160.018) 116.848,160.018 116.848,172.274 ccw(c114.848,172.274) 114.848,174.274 78.335,174.274 ccw(c78.335,172.274) 76.335,172.274 76.335,160.018
  lines w1.2: 86.162,113.13 109.19,113.13
Bottom Solder Mask Layer:
  region: 76.41,137.458 84.311,137.458 84.311,138.46 76.41,138.46
  region: 76.509,147.458 84.411,147.458 84.411,148.459 76.509,148.459
  region: 114.922,147.366 117.023,147.366 117.023,148.267 114.922,148.267
  region: 114.922,138.116 117.023,138.116 117.023,139.018 114.922,139.018
  lines w0.3: 83.56,141.709 85.86,141.709 86.36,141.209 86.36,138.909 86.36,137.309 ; 83.561,144.209 87.061,144.209 87.96,143.309 87.96,138.908 ; 87.96,137.309 87.96,138.909 ; 109.86,141.309 109.86,143.909 110.31,144.359 114.26,144.359 ; 111.36,141.509 111.71,141.859 114.31,141.859
  lines w1: 76.328,114.156 ccw(c78.328,114.156) 78.328,112.156 114.841,112.156 ccw(c114.841,114.156) 116.841,114.156 116.841,126.412 ccw(c114.841,126.412) 114.841,128.412 78.328,128.412 ccw(c78.328,126.412) 76.328,126.412 76.328,114.156 ; 76.333,90.912 ccw(c78.333,90.912) 78.333,88.912 114.846,88.912 ccw(c114.846,90.912) 116.846,90.912 116.846,103.168 ccw(c114.846,103.168) 114.846,105.168 78.333,105.168 ccw(c78.333,103.168) 76.333,103.168 76.333,90.912
  lines w1.2: 86.16,137.309 109.189,137.309
Mech1:
  lines w0.025: 80.479,89.97 80.479,103.74 108.722,103.74 108.722,89.97 80.479,89.97 ; 84.455,113.42 112.698,113.42 112.698,127.191 84.455,127.191 84.455,113.42